# Altium PCB MB989.PcbDoc
Units mil, origin at the board's own origin, x right, y up, seen from the top; angles counter-clockwise.
Board outline 3480 x 2055.28 mil, 2 copper layers (TopLayer, BottomLayer); 40 components, 51 nets, 216 pads, 148 vias.
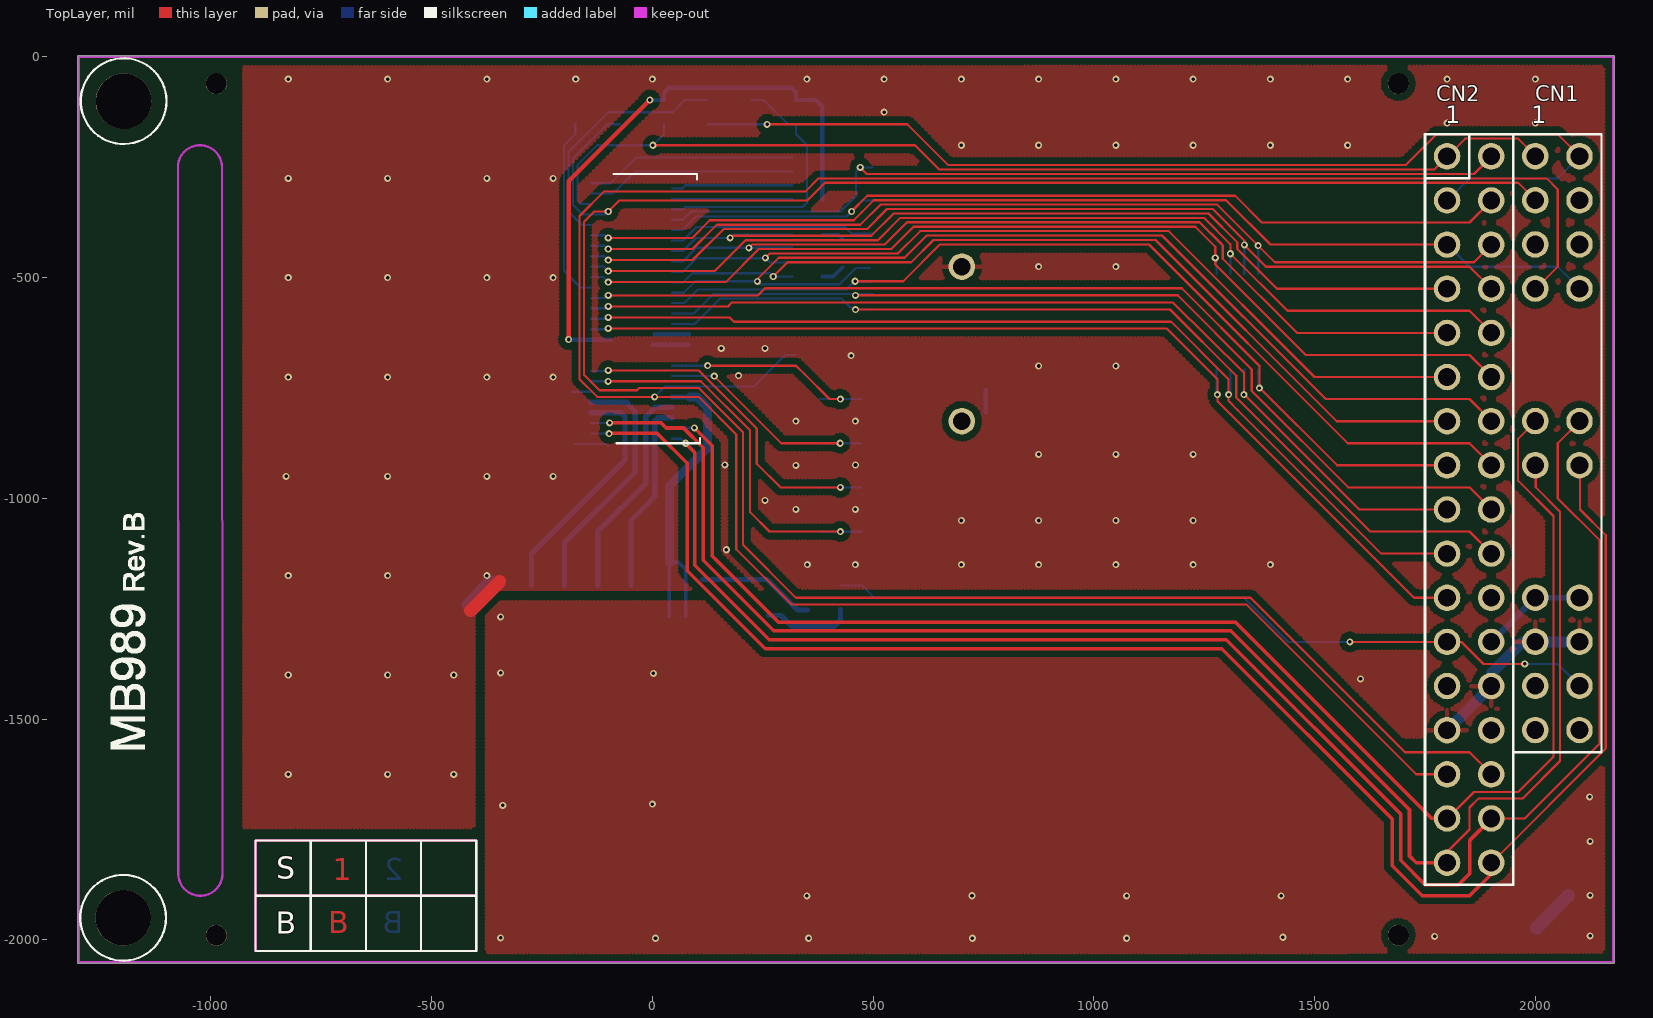
[diagram p0: TopLayer view]
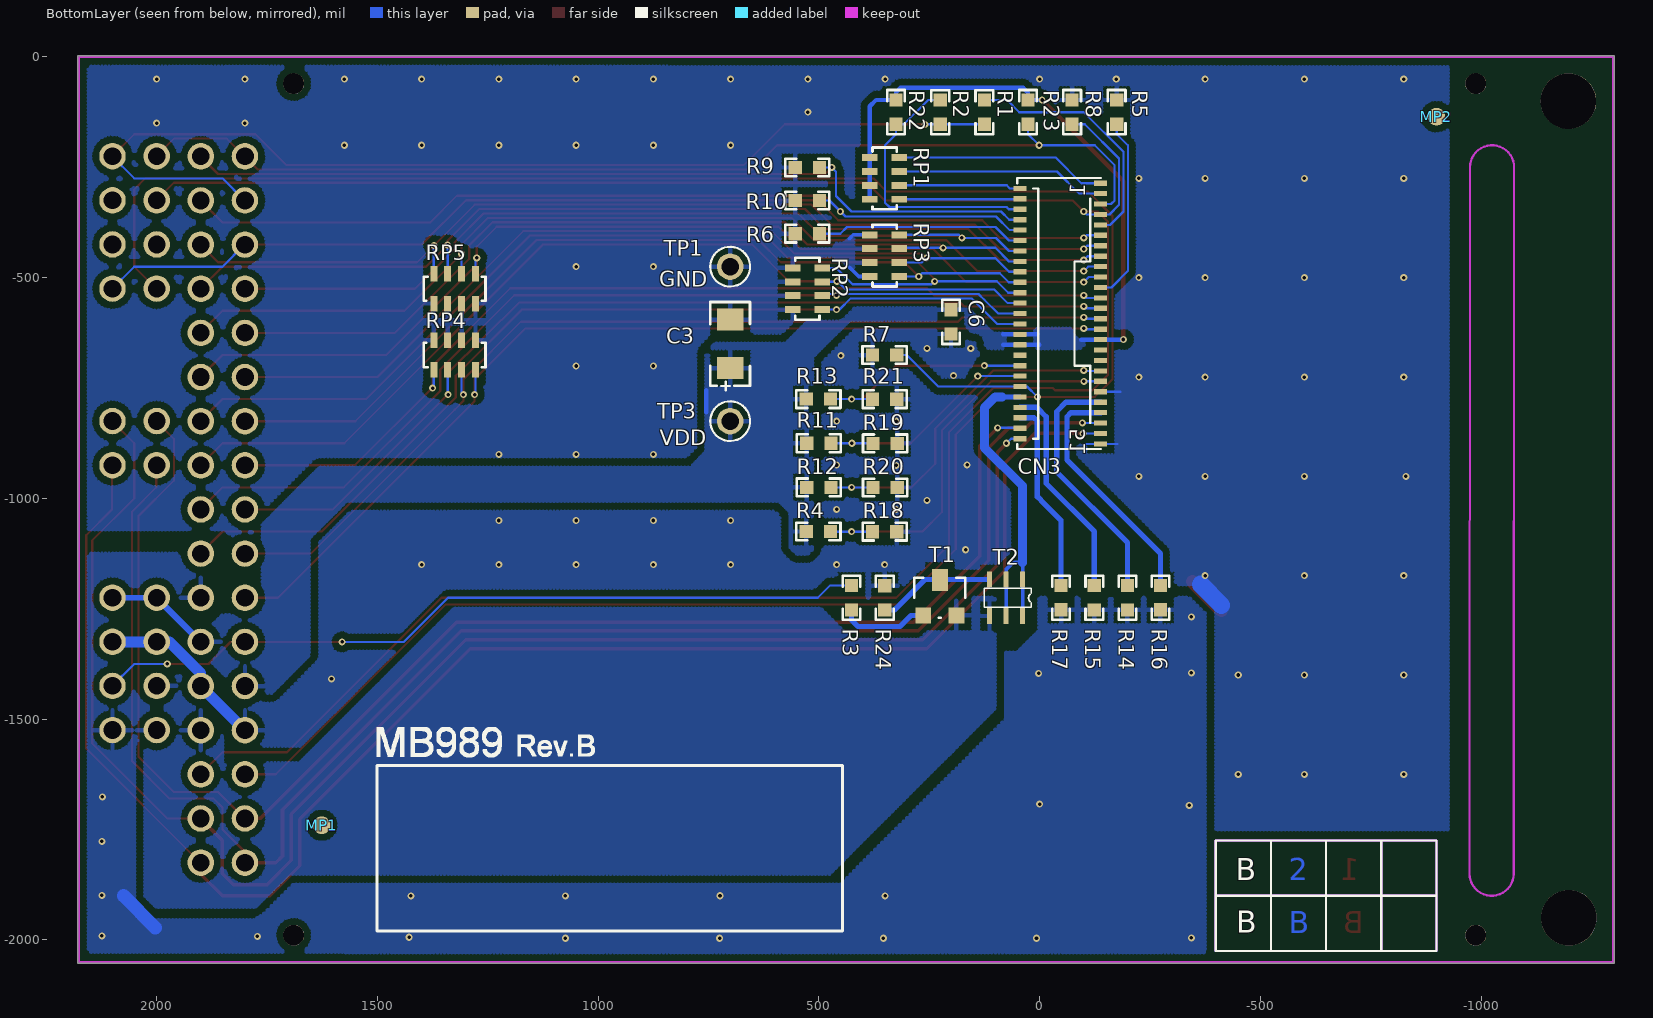
[diagram p1: BottomLayer view, seen from below]

## Layer stack, top to bottom
TopLayer: signal copper 1.4
Dielectric: core 12.6, FR-4, Dk 4.8
BottomLayer: signal copper 1.4

## Board outline
-1301.5,-2052.78 2178.5,-2052.78 2178.5,2.5 -1301.5,2.5

## Design rules (kind name [scope] priority, off if disabled: settings)
Clearance Clearance_5 [(InPoly)] p1: gap=15
Clearance [All] p2: gap=5
ComponentClearance [All] p1 off: gap=10 collisioncheckmode=0 verticalgap=10
HoleSize [All] p1: absolutevalues=TRUE maxlimit=200 minlimit=1 maxpercent=80.000 minpercent=20.000
PolygonConnect [All] p1: connectstyle=Relief reliefconductorwidth=10 reliefentries=4 polygonreliefangle="90 Angle"
RoutingVias RoutingVias_1 [All] p1: holewidth=8 width=16 viastyle="Through Hole" minholewidth=8 minwidth=16 maxholewidth=28 maxwidth=50
SolderMaskExpansion [All] p1: expansion=4
TestPointUsage [All] p1: valid=0 allowmultiple=FALSE
Testpoint [All] p1: side=15 testpointundercomponent=TRUE minsize=40 maxsize=100 preferedsize=60 minholesize=20 maxholesize=40 preferedholesize=32 testpointgrid=1 style=1023 order=0123456789
Width Width_1 [InNet('BLGND')] p1: maxlimit=300 minlimit=7 preferedwidth=12
Width Width_2 [InNet('BLVDD')] p2: maxlimit=300 minlimit=7 preferedwidth=12
Width Width_5 [InNet('GND')] p3: maxlimit=300 minlimit=5 preferedwidth=30
Width Width_6 [InNet('VDD')] p4: maxlimit=300 minlimit=5 preferedwidth=10
Width [All] p5: maxlimit=300 minlimit=5 preferedwidth=8
17 further rules are at their usual default settings.

## Classes and differential pairs
component class MB895C: C1 C2 C3 C4 C5 C6 CN1 CN2 CN3 L1 L2 MP1 MP2 R1 R2 R3 R4 R5 R6 R7 R8 R9 R10 R11 R12 R13 R14 R15 RP1 RP2 RP3 RP4 RP5 U1 Z1
component class MB694: C1 C2 C3 CN3 L1 R1 R2 R3 R4 R5 R6 R7 R8 R9 R10 RP1 RP2 RP3 RP4 RP5 U1 Z1
component class MB542: C1 C2 CN3 L1 R1 R2 R3 R4 R5 R6 R7 R8 R9 R10 R11 R12 RP1 RP2 RP3 RP4 RP5 U2 Z1
component class ColorLCD_Module: C1 C2 CN3 L1 R1 R2 R3 R4 R5 R6 R7 R8 U2 Z1
component class ColorLCD_ModuleA: C1 C2 CN3 L1 R1 R2 R3 R4 R5 R6 R7 R8 RP1 RP2 RP3 RP4 RP5 U2 Z1
component class MB895: C1 C2 C3 C4 C5 C6 CN3 L1 L2 R1 R2 R3 R4 R5 R6 R7 R8 R9 R10 RP1 RP2 RP3 RP4 RP5 U1 Z1
component class MB895B: C1 C2 C3 C4 C5 C6 CN1 CN2 CN3 L1 L2 R1 R2 R3 R4 R5 R6 R7 R8 R9 R10 RP1 RP2 RP3 RP4 RP5 U1 Z1

## Components (designator, comment, footprint, x,y, rotation, side; value= is the part's Value field where it differs from the comment)
C3 "4.7uF/10V" TAN-A 701,-650 r270 bottom
C6 "100nF" 0603C 201,-600 r270 bottom
CN1 "SPI connector" AM240320A 2000,-225 r0 top
CN2 "16-bit connector" 2*17P 1800,-225 r0 top
CN3 "MR028-51" XF2B-5145 -47.24,-580.71 r270 bottom locked
MP1 "" markpoint_1.0 1626,-1740.28 r0 top
MP2 "" markpoint_1.0 -899,-135.28 r0 top
R1 "0" 0603R#1 125,-125 r90 bottom
R2 "0" 0603R#1 225,-125 r90 bottom
R3 "1K" 0603R#1 426,-1225 r270 bottom
R4 "[N/A]" 0603R#1 501,-1075 r0 bottom
R5 "4K7" 0603R#2 -175,-125 r90 bottom
R6 "4K7" 0603R#2 526,-400 r0 bottom
R7 "4K7" 0603R#2 351,-675 r0 bottom
R8 "4K7" 0603R#2 -74,-125 r90 bottom
R9 "4K7" 0603R#2 526,-250 r0 bottom
R10 "4K7" 0603R#2 526,-325 r0 bottom
R11 "[N/A]" 0603R#1 500,-875 r0 bottom
R12 "4K7" 0603R#1 500,-975 r0 bottom
R13 "[N/A]" 0603R#1 501,-775 r0 bottom
R14 "75" 0603R#1 -199,-1225 r90 bottom
R15 "75" 0603R#1 -124,-1225 r90 bottom
R16 "75" 0603R#2 -274,-1225 r90 bottom
R17 "75" 0603R#2 -49,-1225 r90 bottom
R18 "4K7" 0603R#2 350.87,-1075 r0 bottom
R19 "4K7" 0603R#2 350,-875 r0 bottom
R20 "[N/A]" 0603R#2 350,-975 r0 bottom
R21 "4K7" 0603R#2 350.87,-775 r0 bottom
R22 "4K7" 0603R#2 325,-125 r90 bottom
R23 "4K7" 0603R#2 26,-125 r90 bottom
R24 "4K7" 0603R#2 351,-1225 r270 bottom
RP1 "10K" RES-4B#1 351,-275 r90 bottom
RP2 "10K" RES-4B#2 526,-525 r270 bottom
RP3 "10K" RES-4B#2 351,-450 r270 bottom
RP4 "10K" RES-4B#1 1325,-675 r180 bottom
RP5 "10K" RES-4B#2 1325,-525 r180 bottom
T1 "9012" SOT-23 226,-1225 r270 bottom
T2 "FDC606P" SOT23-6L 76,-1225 r0 bottom
TP1 "" TP 701,-475 r180 bottom
TP3 "" TP 701,-825 r180 bottom

## Footprints (in the part's own frame and the unit in brackets; to place one, negate y for a bottom-side part, rotate by r counter-clockwise, add the part's x,y. Pads: shape width x height; smd on the part's side, far side on the other; paste and mask are expansions set on the pad)
2*17P [mil]
  round 60 hole 40: 1(0,0) 2(100,0) 3(0,-100) 4(100,-100) 5(0,-200) 6(100,-200) 7(0,-300) 8(100,-300) 9(0,-400) 10(100,-400) 11(0,-500) 12(100,-500) 13(0,-600) 14(100,-600) 15(0,-700) 16(100,-700) 17(0,-800) 18(100,-800) 19(0,-900) 20(100,-900) 21(0,-1000) 22(100,-1000) 23(0,-1100) 24(100,-1100) 25(0,-1200) 26(100,-1200) 27(0,-1300) 28(100,-1300) 29(0,-1400) 30(100,-1400) 31(0,-1500) 32(100,-1500) 33(0,-1600) 34(100,-1600)
  silkscreen extent -50,-1650 150,50
0603C [mil]
  rect 30x30 smd: 1(27.56,0.28) 2(-27.44,0.28)
  silkscreen extent -50,-20 50,20
0603R#1 [mil]
  rect 30x30 smd: 1(27.5,0) 2(-27.5,0)
  silkscreen extent -50,-20 50,20
0603R#2 [mil]
  rect 30x30 smd: 1(27.56,0.28) 2(-27.44,0.28)
  silkscreen extent -50,-20 50,20
AM240320A [mil]
  round 60 hole 40: 1(0.06,0.28) 2(100.06,0.28) 3(0.06,-99.72) 4(100.06,-99.72) 5(0.06,-199.72) 6(100.06,-199.72) 7(0.06,-299.72) 8(100.06,-299.72) 9(0.06,-999.72) 10(100.06,-999.72) 11(0.06,-1099.72) 12(100.06,-1099.72) 13(0.06,-1199.72) 14(100.06,-1199.72) 15(0.06,-1299.72) 16(100.06,-1299.72) 17(0.06,-599.72) 18(100.06,-599.72) 19(0.06,-699.72) 20(100.06,-699.72)
markpoint_1.0 [mil]
  round 40 smd far side: 0(0,0)
RES-4B#1 [mil]
  rect 15.75x35 smd: 1(47.24,-33.5) 2(47.24,33.5) 3(15.75,-33.5) 4(15.75,33.5) 5(-15.75,-33.5) 6(-15.75,33.5) 7(-47.24,-33.5) 8(-47.24,33.5)
  silkscreen extent -70,-28 70,28
RES-4B#2 [mil]
  rect 15.75x35 smd: 1(47.24,33.5) 2(47.24,-33.5) 3(15.75,33.5) 4(15.75,-33.5) 5(-15.75,33.5) 6(-15.75,-33.5) 7(-47.24,33.5) 8(-47.24,-33.5)
  silkscreen extent -70,-28 70,28
SOT23-6L [mm]
  rect 0.3x0.9 smd: 1(-0.95,-1.05) 2(0,-1.05) 3(0.95,-1.05) 4(0.95,1.05) 5(0,1.05) 6(-0.95,1.05)
  silkscreen extent -1.45,-0.55 1.25,0.55
SOT-23 [mil]
  rect 36x36 smd: 1(40,37.5) 2(40,-37.5)
  rect 50x36 smd: 3(-40,0.5)
  silkscreen extent -45,-58 45,58
TAN-A [mil]
  rect 50x60 smd: 1(55,0) 2(-55,0)
  silkscreen extent -95,-45 105,45
TP [mil]
  round 60 hole 40: 1(0,0)
  silkscreen extent -45,-45 45,45
XF2B-5145 [mm]
  rect 0.3x0.75 smd: 1(-7.488,2.318) 2(-7.188,-2.332) 3(-6.888,2.318) 4(-6.588,-2.332) 5(-6.288,2.318) 6(-5.988,-2.332) 7(-5.688,2.318) 8(-5.388,-2.332) 9(-5.088,2.318) 10(-4.788,-2.332) 11(-4.488,2.318) 12(-4.188,-2.332) 13(-3.888,2.318) 14(-3.588,-2.332) 15(-3.288,2.318) 16(-2.988,-2.332) 17(-2.688,2.318) 18(-2.388,-2.332) 19(-2.088,2.318) 20(-1.788,-2.332) 21(-1.488,2.318) 22(-1.188,-2.332) 23(-0.888,2.318) 24(-0.588,-2.332) 25(-0.288,2.318) 26(0.012,-2.332) 27(0.312,2.318) 28(0.612,-2.332) 29(0.912,2.318) 30(1.212,-2.332) 31(1.512,2.318) 32(1.812,-2.332) 33(2.112,2.318) 34(2.412,-2.332) 35(2.712,2.318) 36(3.012,-2.332) 37(3.312,2.318) 38(3.612,-2.332) 39(3.912,2.318) 40(4.212,-2.332) 41(4.512,2.318) 42(4.812,-2.332) 43(5.112,2.318) 44(5.412,-2.332) 45(5.712,2.318) 46(6.012,-2.332) 47(6.312,2.318) 48(6.612,-2.332) 49(6.912,2.318) 50(7.212,-2.332) 51(7.512,2.318)
  silkscreen extent -7.79,-2.48 7.81,2.32

## Free pads (board coordinates)
  round 47.24 hole 47.24 unplated: 0(1689.66,-1989.57) 1(-988.1,-1989.57) 2(-988.1,-60.43) 3(1689.66,-60.43)
  round 125.98 hole 125.98 unplated: 4(-1197.94,-100) 5(-1199,-1950)

## Via types
v1: diameter 16, hole 8, TopLayer to BottomLayer, tented both sides, 148 vias

## Nets (pads, with @x,y where several pads share a name; then routed paths per layer and width w, separated by ;. In a path a pad name is that pad's centre, name@x,y a point inside that pad or via, vN(x,y) a via of type N, cw(c..) or ccw(c..) an arc to the next point about the centre after c; other vN are vias at no path point)
#RESET: CN1.8 CN2.5 CN3.11 | length 2360.5
  TopLayer w5: v1(-100,-410) 90,-410 130,-370 456,-370 474.04,-351.96 501.53,-324.47 1299.47,-324.47 1400,-425 CN2.5@1801,-425
  BottomLayer w5: CN3.11 -105.98,-404.02 v1(-100,-410) ; CN2.5@1801,-425 1851,-475 2051,-475 CN1.8@2101,-525
BL_CONTROL: CN1.14 CN2.23 R3.2 | length 1769.2
  TopLayer w5: v1(1580,-1325) 1832.82,-1325 1882.82,-1375 v1(1976,-1375)
  BottomLayer w5: R3.2 475,-1197.5 502.5,-1225 1340,-1225 1440,-1325 v1(1580,-1325) ; v1(1976,-1375) 2051,-1375 CN1.14@2101,-1425
BLGND: CN1.15 CN1.16 CN2.22 R14.2 R15.2 R16.2 R17.2 | length 101.8
  BottomLayer w30: 2003,-1972.28 2075,-1900.28
  other v1: 7,-1996.28 354,-1996.28 725,-1996.28 1074,-1996.28 -344,-1995.28 1427.94,-1994 1771.94,-1992 2123.94,-1991 350,-1900.28 723.94,-1900 1074,-1900.28 1424,-1900.28 2123.94,-1899 2123.94,-1777 -339,-1695.28 0,-1692.28 2123,-1676.28 2,-1396.28 -344,-1395.28 -344,-1268.28
BLVDD: CN1.13 CN2.28 T1.1 T2.4
CS: CN1.1 CN2.1 CN3.5 R23.2 | length 2430.9
  TopLayer w5: v1(1,-200) 595,-200 650,-255 1771,-255 1841,-185 1961,-185 CN1.1@2001,-225
  BottomLayer w5: CN3.5 -161.85,-333.15 -170,-325 -170,-245 -125,-200 v1(1,-200) 26.28,-174.72 R23.2
DOTCLK: CN3.2 RP1.5 | length 275.8
  BottomLayer w5: CN3.2 67.28,-297.72 74.25,-290.75 RP1.5
ENABLE: CN3.1 RP1.1 | length 480.1
  BottomLayer w5: CN3.1 -94.71,-285.91 -36.56,-227.76 RP1.1
GND: C3.2 C6.1 CN1.11 CN1.12 CN2.26 CN2.27 CN3.41 CN3.51 R5.1 R6.1 R7.1 R8.1 R9.1 R10.1 R18.2 R19.2 R20.2 R21.2 R24.2 RP2.2 RP2.4 RP2.6 RP2.8 RP3.2 RP3.4 RP3.6 RP3.8 RP4.2 RP4.4 RP4.6 RP4.8 RP5.2 RP5.4 RP5.6 RP5.8 TP1.1 | length 919.4
  TopLayer w30: -412.06,-1254 -346.35,-1188.28
  BottomLayer w5: -182.94,-758.35 CN3.41 ; -176.52,-876.46 -104.53,-876.46 -100.06,-880.92
  BottomLayer w8: RP3.2 409.69,-497.24 430.65,-476.28 ; RP3.8 421.94,-402.76 431.46,-412.28
  BottomLayer w12: v1@350.72,-1150.28 v1(351,-1150) ; CN2.26@1901,-1425 1901,-1400 CN1.11@1976,-1325
  BottomLayer w25: CN2.27@1801,-1525 1901,-1425 1901,-1395 1971,-1325 CN1.12@2101,-1325
  BottomLayer w40: -411.72,-1241.72 -365,-1195
  other v1: -825,-1625 -600,-1625 -450,-1625 1603.94,-1409 -825,-1400 -600,-1400 -450,-1400 -825,-1175 -600,-1175 -375,-1175 459.94,-1150 700,-1150 875,-1150 1050,-1150 1225,-1150 1400,-1150 167.54,-1116.28 700,-1050 875,-1050 1050,-1050 1225,-1050 325,-1025 459.94,-1025 255,-1004.28 -830,-950 -600,-950 -375,-950 -225,-950 325,-925 163.94,-924 460,-924.28 875,-900 1050,-900 1225,-900 325,-825 459.94,-825 -825,-725 -600,-725 -375,-725 -225,-725 195,-721.79 875,-700 1050,-700 450,-676.28 155.94,-660 255,-660.28 -825,-500 -600,-500 -375,-500 -225,-500 875,-475 1050,-475 -825,-275 -600,-275 -375,-275 -225,-275 700,-200 875,-200 1050,-200 1225,-200 1400,-200 1575,-200 1800,-150 2000,-150 525,-125 -825,-50 -600,-50 -375,-50 -173.72,-50.28 0,-50 350,-50 525,-50 700,-50 875,-50 1050,-50 1225,-50 1400,-50 1575,-50 1800,-50 2000,-50
HSYNC: CN3.3 RP1.3 | length 476.8
  BottomLayer w5: CN3.3 -89.71,-309.53 -39.43,-259.25 RP1.3
IM0: CN3.39 R4.2 R18.1 | length 908.6
  TopLayer w5: v1(-100.28,-734.72) 109.72,-734.72 221.35,-846.35 221.35,-1031.35 265,-1075 v1(426,-1075)
  BottomLayer w5: CN3.39 v1(-100.28,-734.72) ; R18.1 R4.2@473.22,-1075.28
IM1: CN3.38 R11.2 R19.1 | length 538.6
  TopLayer w5: v1(140,-722.91) 140,-723.18 291.82,-875 v1(425,-875)
  BottomLayer w5: CN3.38 v1(140,-722.91) ; R19.1 377.85,-875 R11.2
IM2: CN3.37 R12.2 R20.1 | length 816.4
  TopLayer w5: v1(-100,-710) 105,-710 236.49,-841.5 236.49,-921.5 290,-975 v1(426,-975)
  BottomLayer w5: CN3.37 -101.1,-711.1 v1(-100,-710) ; R20.1@377.72,-975 R12.2
IM3: CN3.36 R13.2 R21.1 | length 507.6
  TopLayer w5: v1(125,-699.29) 325.29,-699.29 344.9,-718.9 401,-775 v1(426,-775)
  BottomLayer w5: CN3.36 v1(125,-699.29) ; R21.1@378.72,-775 R13.2
NetR3_1: R3.1 T1.2 | length 201.6
  BottomLayer w12: T1.2 291,-1265 316,-1290 411,-1290 426,-1275 R3.1
NetR14_1: CN3.43 R14.1 | length 569
  BottomLayer w12: R14.1 -199,-1100 -39,-940 -39,-803 -60.03,-781.97 CN3.43
NetR15_1: CN3.44 R15.1 | length 496
  BottomLayer w12: R15.1 -124,-1075 -15.22,-966.22 -15.22,-815.22 6.22,-793.78 CN3.44
NetR16_1: CN3.45 R16.1 | length 550.5
  BottomLayer w12: R16.1 -273.72,-1124.72 -62,-913 -62,-815 -71.41,-805.59 CN3.45
NetR17_1: CN3.46 R17.1 | length 437.4
  BottomLayer w12: R17.1 -48.72,-1049.72 -11.39,-1012.39 5,-996 5,-825 12.6,-817.4 CN3.46
NetR24_1: R24.1 T1.3 T2.3 | length 265.9
  BottomLayer w12: T2.3 259.66,-1183.66 328.56,-1252.56 R24.1
NetT2_5: CN3.42 T2.1 T2.2 T2.5 T2.6 | length 747.3
  BottomLayer w8: T2.6 38.6,-1145 60,-1145 76,-1161 T2.5
  BottomLayer w12: CN3.42 84.84,-770.16
  BottomLayer w20: 38.6,-1145 38.6,-971.4 125,-885 125,-795 100,-770 85,-770 84.84,-770.16
PD0: CN3.12 R6.2 | length 473
  BottomLayer w5: CN3.12 69.17,-415.83 99.88,-385.12 436.12,-385.12 451.28,-400.28 R6.2
PD1: CN2.6 CN3.13 RP5.7 | length 2219.1
  TopLayer w5: v1(-100,-435) 91,-435 146,-380 471,-380 516.53,-334.47 1279.47,-334.47 1410,-465 1861,-465 CN2.6@1901,-425
  BottomLayer w5: CN3.13 -107.36,-427.64 v1(-100,-435) ; RP5.7 v1(1372.24,-427.24)
PD2: CN2.7 CN3.14 RP3.7 | length 2015.5
  TopLayer w5: v1(176,-410) 181,-405 496,-405 546.53,-354.47 1259.47,-354.47 1325,-420 1325,-435 1415,-525 CN2.7@1801,-525
  BottomLayer w5: CN3.14 69.45,-439.45 98.9,-410 v1(176,-410) 183.24,-402.76 RP3.7
PD3: CN2.8 CN3.15 RP5.5 | length 2237.4
  TopLayer w5: v1(-100,-460) 91,-460 161,-390 486,-390 531.53,-344.47 1269.47,-344.47 1340.75,-415.75 v1(1340.75,-425.75) 1390,-475 1851,-475 CN2.8@1901,-525
  BottomLayer w5: CN3.15 -108.74,-451.26 v1(-100,-460) ; RP5.5 v1(1340.75,-425.75)
PD4: CN2.9 CN3.16 RP3.5 | length 2022.5
  TopLayer w5: v1(218.64,-432.36) 226,-425 526,-425 576.53,-374.47 1239.47,-374.47 1290,-425 ; 1282.21,-417.21 1292,-427 1292,-457 1460,-625 CN2.9@1801,-625
  BottomLayer w5: CN3.16 69.29,-463.07 100,-432.36 RP3.5@315.61,-432.36
PD5: CN2.10 CN3.17 RP5.3 | length 2259.9
  TopLayer w5: v1(-100,-485) 141,-485 197.16,-428.84 211,-415 511,-415 561.53,-364.47 1249.47,-364.47 1309.25,-424.25 v1(1309.25,-445.75) 1438.5,-575 1851,-575 CN2.10@1901,-625
  BottomLayer w5: CN3.17 -110.12,-474.88 v1(-100,-485) ; RP5.3 v1(1309.25,-445.75)
PD6: CN2.11 CN3.18 RP3.3 | length 1996.1
  TopLayer w5: v1(256,-455) 266,-445 556,-445 606.53,-394.47 1169.47,-394.47 1500,-725 CN2.11@1801,-725
  BottomLayer w5: CN3.18 69.29,-486.69 100,-455.98 255.02,-455.98 v1(256,-455) ; v1@256.98,-455.98 266.75,-465.75 RP3.3
PD7: CN2.12 CN3.19 RP5.1 | length 2298.4
  TopLayer w5: v1(-100,-510) 166,-510 241,-435 541,-435 591.53,-384.47 1229.47,-384.47 1275,-430 1275,-470 1480,-675 1851,-675 CN2.12@1901,-725
  BottomLayer w5: CN3.19 -111.5,-498.5 v1(-100,-510) ; v1(1275,-455) 1277.76,-457.76 RP5.1
PD8: CN2.13 CN3.20 RP3.1 | length 2016.4
  TopLayer w5: v1(273.76,-497.24) 306,-465 586,-465 636.53,-414.47 1139.47,-414.47 1550,-825 CN2.13@1801,-825
  BottomLayer w5: CN3.20 69.68,-510.32 90,-490 266.51,-490 v1(273.76,-497.24) ; v1@273.24,-497.24 RP3.1
PD9: CN3.21 R5.2 | length 419.9
  BottomLayer w5: R5.2 -174.72,-174.72 -200,-200 -200,-485 -162.87,-522.13 CN3.21
PD10: CN2.14 CN3.22 RP2.7 | length 2355.1
  TopLayer w5: v1@237.77,-503.23 286,-455 571,-455 621.53,-404.47 1154.47,-404.47 1525,-775 1851,-775 CN2.14@1901,-825
  BottomLayer w5: CN3.22 71.06,-533.94 96.77,-508.23 v1(237.77,-508.23) 244.54,-515 423.76,-515 461,-477.76 RP2.7
PD11: CN2.15 CN3.23 RP4.7 | length 2186.9
  TopLayer w5: v1(-100,-540) 239,-540 255,-524 1199,-524 1375,-700 v1(1375,-750) ; v1@1375,-749 1551,-925 CN2.15@1801,-925
  BottomLayer w5: CN3.23 -105.75,-545.75 v1(-100,-540) ; RP4.7 1372.24,-747.24 v1(1375,-750)
PD12: CN2.16 CN3.24 RP2.5 | length 2151.4
  TopLayer w5: v1(459,-508) 568,-508 651,-425 1125,-425 1575,-875 1851,-875 CN2.16@1901,-925
  BottomLayer w5: CN3.24 72.11,-557.56 102.82,-526.85 439.15,-526.85 456.75,-509.25 RP2.5
PD13: CN2.17 CN3.25 RP4.5 | length 2226.6
  TopLayer w5: v1(-100,-565) 171,-565 180,-556 1179,-556 1340,-715 v1(1340,-765) ; v1@1340,-764 1601,-1025 CN2.17@1801,-1025
  BottomLayer w5: CN3.25 -104.37,-569.37 v1(-100,-565) ; v1(1340,-765) v1@1341.75,-763.25 ; v1@1340.75,-764.25 RP4.5
PD14: CN2.18 CN3.26 RP2.3 | length 2143.6
  TopLayer w5: v1(460,-539.85) 1189.85,-539.85 1357.8,-707.8 1357.8,-756.8 1369.48,-768.48 1576,-975 1851,-975 CN2.18@1901,-1025
  BottomLayer w5: CN3.26 93.82,-581.18 125.31,-549.69 138.15,-536.85 RP2.3@499.15,-536.85
PD15: CN2.19 CN3.27 RP4.3 | length 2249.3
  TopLayer w5: v1(-100,-590) 175,-590 185,-600 1175,-600 1305,-730 1305,-779 1324.97,-798.97 1651,-1125 CN2.19@1801,-1125
  BottomLayer w5: CN3.27 -102.99,-592.99 v1(-100,-590) ; v1(1305,-765) 1309.25,-760.75 RP4.3
PD16: CN2.20 CN3.28 RP2.1 | length 2181.1
  TopLayer w5: v1(460,-572.24) 1172.24,-572.24 1322.29,-722.29 1322.29,-771.29 1330.46,-779.46 1626,-1075 1851,-1075 CN2.20@1901,-1125
  BottomLayer w5: CN3.28 96.2,-604.8 154.15,-546.85 427.85,-546.85 453.24,-572.24 RP2.1
PD17: CN2.21 CN3.29 RP4.1 | length 2279.6
  TopLayer w5: v1(-100,-615) 1165,-615 1280,-730 1280,-780 1725,-1225 CN2.21@1801,-1225
  BottomLayer w5: CN3.29 -101.61,-616.61 v1(-100,-615) ; RP4.1 1277.76,-762.76 v1(1280,-765)
RD: CN2.4 CN3.10 R10.2 | length 1992.2
  TopLayer w5: v1(451,-350) 486.53,-314.47 1320,-314.47 1380.53,-375 1851,-375 CN2.4@1901,-325
  BottomLayer w5: CN3.10 67.8,-392.2 98.5,-361.5 439.5,-361.5 475.72,-325.28 R10.2
RS: CN2.2 CN3.8 R9.2 | length 1988.2
  TopLayer w5: v1(470.72,-250.28) 485.43,-265 1861,-265 CN2.2@1901,-225
  BottomLayer w5: CN3.8 68.58,-368.58 87.17,-350 426,-350 461,-315 461,-260 v1(470.72,-250.28) R9.2
SCL: CN3.6 R2.1 R22.2 | length 622.5
  BottomLayer w5: CN3.6 69.96,-344.96 74.92,-340 340,-340 350,-330 350,-200 325.28,-175.28 R22.2 307.44,-152.44 252.5,-97.5 R2.1
SDI: CN1.3 CN2.30 CN3.7 R8.2 | length 5475.5
  TopLayer w5: CN2.30@1901,-1625 1851,-1575 1705,-1575 1355,-1225 325,-1225 205,-1105 205,-850 105,-750 -30,-750 -35,-755 -120,-755 -155,-720 -155,-373.28 -131.72,-350 v1(-100,-350) -75,-325 351,-325 391,-285 1961,-285 CN1.3@2001,-325
  BottomLayer w5: v1(-100,-350) -106.77,-356.77 -158.23,-356.77 -180,-335 -180,-230 -102.44,-152.44 R8.2
SDO: CN1.7 CN2.29 CN3.40 R7.2 | length 5724.1
  TopLayer w5: CN2.29@1801,-1625 1730,-1625 1345,-1240 315,-1240 190,-1115 190,-855 105,-770 -125,-770 -165,-730 -165,-360 -110,-305 346,-305 376,-275 2026,-275 2051,-300 2051,-475 CN1.7@2001,-525
  BottomLayer w5: v1(5,-770) 28.46,-746.54 229.46,-746.54 300.72,-675.28 R7.2
VDD: C3.1 C6.2 CN1.9 CN1.10 CN2.24 CN2.25 CN3.30 CN3.31 CN3.32 R4.1 R11.1 R12.1 R13.1 R22.1 R23.1 RP1.2 RP1.4 RP1.6 RP1.8 TP3.1 | length 1815
  TopLayer w10: v1(-190,-640) -190,-281.57 v1(-5.87,-97.44)
  BottomLayer w10: v1(-190,-640) -189.76,-640.24 -94.05,-640.24 ; v1(-5.87,-97.44) R23.1 26.28,-81.15 37.44,-70 315,-70 325.28,-80.28 R22.1 370.37,-97.44 384.5,-111.56 RP1.8 ; 0.24,-652.05 81.89,-652.05 ; 5.51,-628.43 82.81,-628.43 ; 755,-805 755,-755
  BottomLayer w12: CN1.9@2001.06,-1224.72 CN1.10@2101.06,-1224.72
  BottomLayer w15: CN2.24@1901,-1325 1901,-1324.78 2001.06,-1224.72 CN1.9@2001.06,-1224.94
VSYNC: CN3.4 RP1.7 | length 273.3
  BottomLayer w5: CN3.4 45.48,-322.24 RP1.7
WR: CN3.9 R1.1 | length 562.8
  BottomLayer w5: CN3.9 -159.61,-380.39 -190,-350 -190,-215 -100,-125 46,-125 73.5,-97.5 R1.1
WR_SCL: CN1.2 CN2.3 R1.2 R2.2 | length 2405.4
  TopLayer w5: v1(260,-152.5) 577.5,-152.5 670,-245 1706,-245 1776,-175 2051,-175 CN1.2@2101,-225
  BottomLayer w5: R1.2 v1(260,-152.5) ; CN2.3@1801,-325 1851,-275 2051,-275 CN1.2@2101,-225
XL: CN1.17 CN2.31 CN3.48 | length 3377.6
  TopLayer w5: CN2.31@1801,-1725 1861,-1665 1961,-1665 2041,-1585 2041,-1040 1961,-960 1961,-865 CN1.17@2001,-825
  TopLayer w8: v1(95,-840) 135.52,-880.52 135.52,-1130.52 285,-1280 1320,-1280 1765,-1725 CN2.31@1801,-1725
  BottomLayer w5: CN3.48 45.6,-840 v1(95,-840)
XR: CN1.18 CN2.32 CN3.50 | length 3697.4
  TopLayer w5: CN2.32@1901,-1725 1976,-1725 2146,-1555 2146,-1095 2051,-1000 2051,-875 CN1.18@2101,-825
  TopLayer w8: v1(75,-875) 96,-896 96,-1151 265,-1320 1300,-1320 1695,-1715 1695,-1820 1750,-1875 1826,-1875 1851,-1850 1851,-1775 CN2.32@1901,-1725
  BottomLayer w5: CN3.50 64.65,-864.65 v1(75,-875)
YD: CN1.19 CN2.33 CN3.47 | length 3649.7
  TopLayer w5: CN2.33@1801,-1825 1801,-1800 1851,-1750 1851,-1700 1871,-1680 1971,-1680 2056,-1595 2056,-1030 2001,-975 CN1.19@2001,-925
  TopLayer w8: v1(-97,-829) 20,-829 31.49,-840.49 70.49,-840.49 115,-885 115,-1140 275,-1300 1310,-1300 1715,-1705 1715,-1810 1730,-1825 CN2.33@1801,-1825
  BottomLayer w5: CN3.47 v1@-97.21,-829.21
YU: CN1.20 CN2.34 CN3.49 | length 3754.9
  TopLayer w5: v1@-98.17,-852.83 v1@-97.83,-852.83 ; CN2.34@1901,-1825 2159.41,-1566.59 2159.41,-1083.41 2101,-1025 CN1.20@2101,-925
  TopLayer w8: v1(-98,-853) -97.83,-852.83 11.33,-852.83 78.5,-920 78.5,-1163.5 255.28,-1340.28 1290,-1340.28 1675.94,-1726.22 1675.94,-1831.76 1744.18,-1900 1776,-1900 1851,-1900 1901,-1850 CN2.34@1901,-1825
  BottomLayer w5: CN3.49 v1@-98.17,-852.83
pads on no net: CN1.4 CN1.5 CN1.6 CN3.33 CN3.34 CN3.35 MP1.0 MP2.0
copper on no net: | length 5515
  TopLayer w5: -899,-1900 -399,-1900 ; -774,-2025 -774,-1775 ; -649,-2025 -649,-1775 ; -524,-1775 -524,-1800 -524,-2025 ; -399,-1790 -399,-1775 ; -524,-2025 -899,-2025 -899,-1800 -899,-1775 -399,-1775 ; -524,-2025 -399,-2025 -399,-1800 -399,-1775
  BottomLayer w5: -774,-2025 -774,-1900 -774,-1775 ; -649,-2025 -649,-1900 -649,-1775 ; -524,-1775 -524,-1900 ; -399,-1900 -524,-1900 ; -899,-1900 -899,-2025 -524,-2025 ; -899,-1900 -899,-1775 -399,-1775 -399,-2025 -524,-2025 ; -899,-1900 -524,-1900 ; -524,-2025 -524,-1900

## Polygon pours and split planes (outlines as drawn)
BLGND on TopLayer "TopLayer-BLGND" (hatched 90Degree grid 8 track 10, remove dead copper, pour order 1000): -375,-1250 -375,-2050 2180,-2050 2180,-1610 2130,-1610 1851,-1889 1765,-1889 1710,-1834 1710,-1720 1290,-1300 250,-1300 185,-1235 -365,-1235 -380,-1250
GND on TopLayer "TopLayer-GND" (hatched 90Degree grid 8 track 10, remove dead copper, pour order 1001): -915,-1745 -405,-1745 -405,-1239.06 -370.94,-1205 1315.94,-1205 1650.94,-1540 1915,-1540 1915,-1345 2175,-1345 2175,0 -925,0 -925,-1745
VDD on BottomLayer "BottomLayer-VDD" (hatched 90Degree grid 8 track 10, remove dead copper, pour order 1002): 563.5,-780.28 755,-780.28 755,-895 790,-930 585,-930 565,-910 565,-780
GND on BottomLayer "BottomLayer-GND" (hatched 90Degree grid 8 track 10, remove dead copper, pour order 1003): -925,0 -925,-1750 -400,-1750 -400,-1195 350.72,-1195 380.72,-1225 1340,-1225 1675,-1560 1810,-1560 1810,-1105 1845,-1070 2175,-1070 2175,-5 -925,-5
VDD on BottomLayer "BottomLayer-VDD 1" (hatched 90Degree grid 8 track 10, remove dead copper, pour order 1004): -90,-660 115,-660 180,-595 430,-595 515,-680 515,-1115 525,-1125 550,-1125 565,-1110 565,-1030 590,-1005 1570,-1005 1630,-1065 1655,-1090 1655,-1355 1740,-1440 1805,-1440 1901,-1344 1901,-1315 1851,-1265 1775,-1265 1760,-1250 1760,-1060 1630,-930 590,-930 565,-905 565,-805 580,-790 670,-790 701,-821 755,-767 755,-670 735,-650 575,-650 485,-560 145.79,-560 90.79,-615 -75,-615 -100,-640 -100,-655
BLGND on BottomLayer "BottomLayer-BLGND" (hatched 90Degree grid 8 track 10, remove dead copper, pour order 1005): -299,-1225 1,-1225 1,-1300 51,-1350 76,-1350 76,-1500 451,-1875 1696,-1875 1776,-1955 2051,-1955 2051,-1575 2001.94,-1575 2001.94,-1420 2101,-1420 2101,-1225 1901,-1225 1901,-1125 2176,-1125 2176,-2050 -374,-2050 -374,-1225
BLVDD on BottomLayer "BottomLayer-BLVDD" (hatched 90Degree grid 8 track 10, remove dead copper, pour order 1006): 101,-1225 226,-1225 226,-1275 271,-1320 426,-1320 496,-1250 1326,-1250 1676,-1600 1851,-1600 1851,-1500 1916,-1435 1951,-1400 2026,-1400 2026,-1925 1776,-1925 1701,-1850 476,-1850 101,-1475

## Keep-outs
KeepOutLayer:
  lines w5: -774,-2025 -774,-1900 -774,-1775 ; -649,-2025 -649,-1900 -649,-1775 ; -399,-1900 -524,-1900 ; -899,-1900 -524,-1900 ; -899,-1900 -899,-2025 -524,-2025 ; -899,-1900 -899,-1775 -524,-1775 ; -524,-2025 -524,-1900 ; -524,-2025 -399,-2025 -399,-1775 -524,-1775 ; -524,-1900 -524,-1775 ; -1299,-2050.28 -1299,-0.28 2176,0 2176,-2050 -1299,-2050.28 ; -1075,-250 cw(c-1025,-250) -975,-250 -974,-1850 cw(c-1024,-1850) -1074,-1850 -1075,-250

## Other copper
TopLayer:
  text "1" at -724,-1865 h50
  text "B" at -734,-1985 h50
BottomLayer:
  text "2" at -564,-1865 h50
  text "B" at -564,-1985 h50

## Silkscreen, mask and mechanical layers (free items; w line width, h text height)
TopOverlay:
  drawing of 1083 lines, arcs and shapes, not listed
  text "1" at 1796,-150 h40
  text "1" at 1991,-150 h40
  text "S" at -852,-1861 h50
  text "B" at -853,-1986 h50
BottomOverlay:
  drawing of 971 lines, arcs and shapes, not listed
  text "GND" at 861,-520 h35
  text "VDD" at 860,-880 h35
  text "B" at -444,-1865 h50
  text "B" at -445,-1984 h50
Mechanical1:
  lines w5: -1299,-2050.28 -1299,-0.28 2176,0 2176,-1920 2176,-2050 -1299,-2050.28 ; -1075,-250 cw(c-1025,-250) -975,-250 -974,-1850 cw(c-1024,-1850) -1074,-1850 -1075,-250

## Text inside footprints (layer, text, board x,y; h text height)
CN3: BottomOverlay "1" at -103.06,-285.91 h35 r270; BottomOverlay "51" at -103.06,-841.02 h35 r270